# EAGLE board LEDSubMatrixLowDensitySMD - Copy (EAGLE 9.5.2)
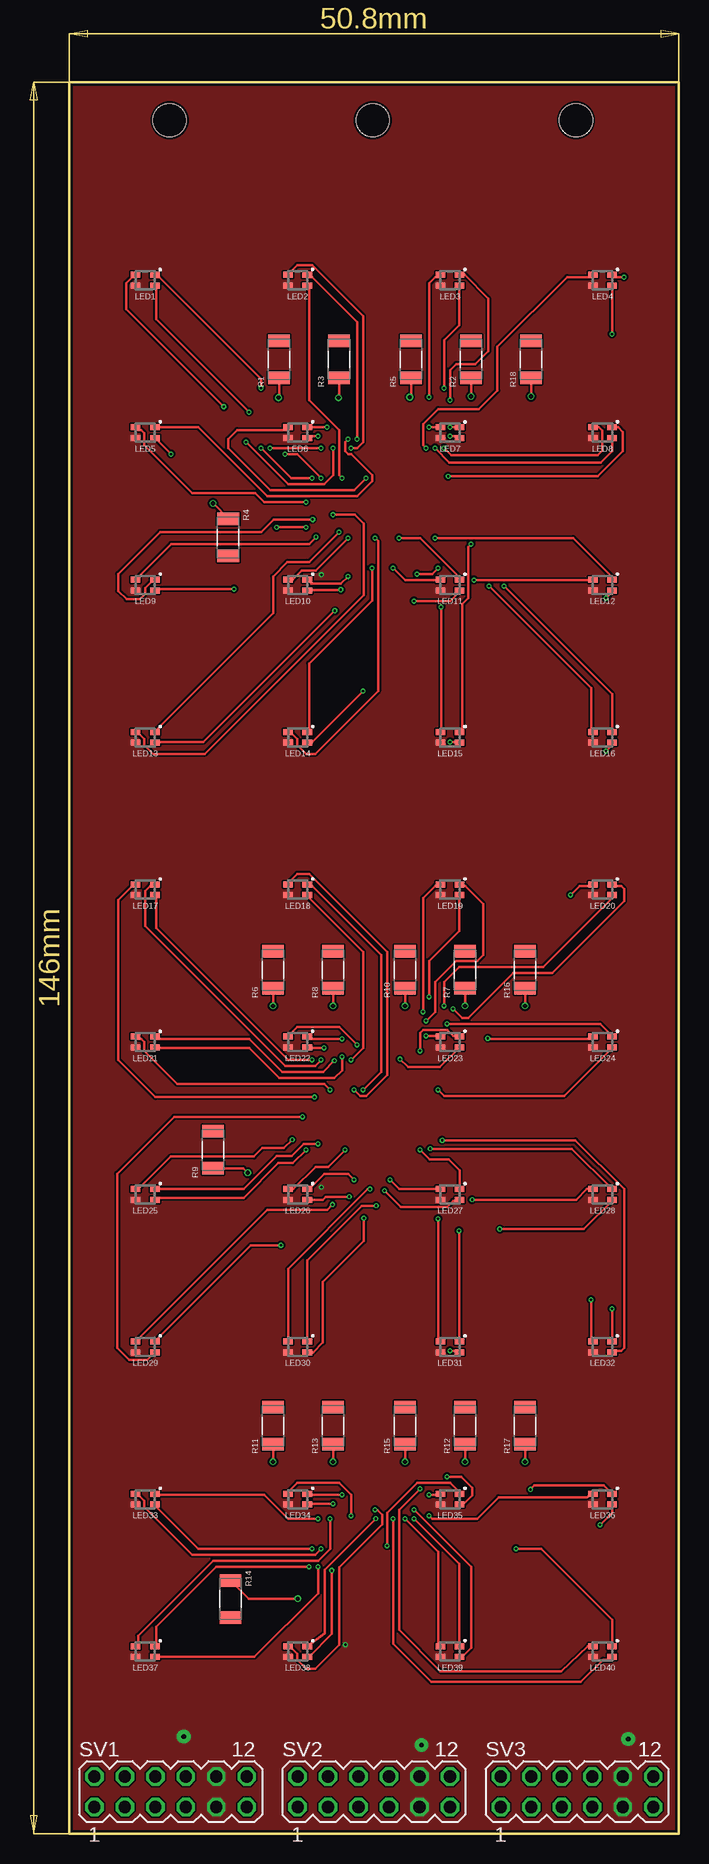
[diagram p0: board, top side]
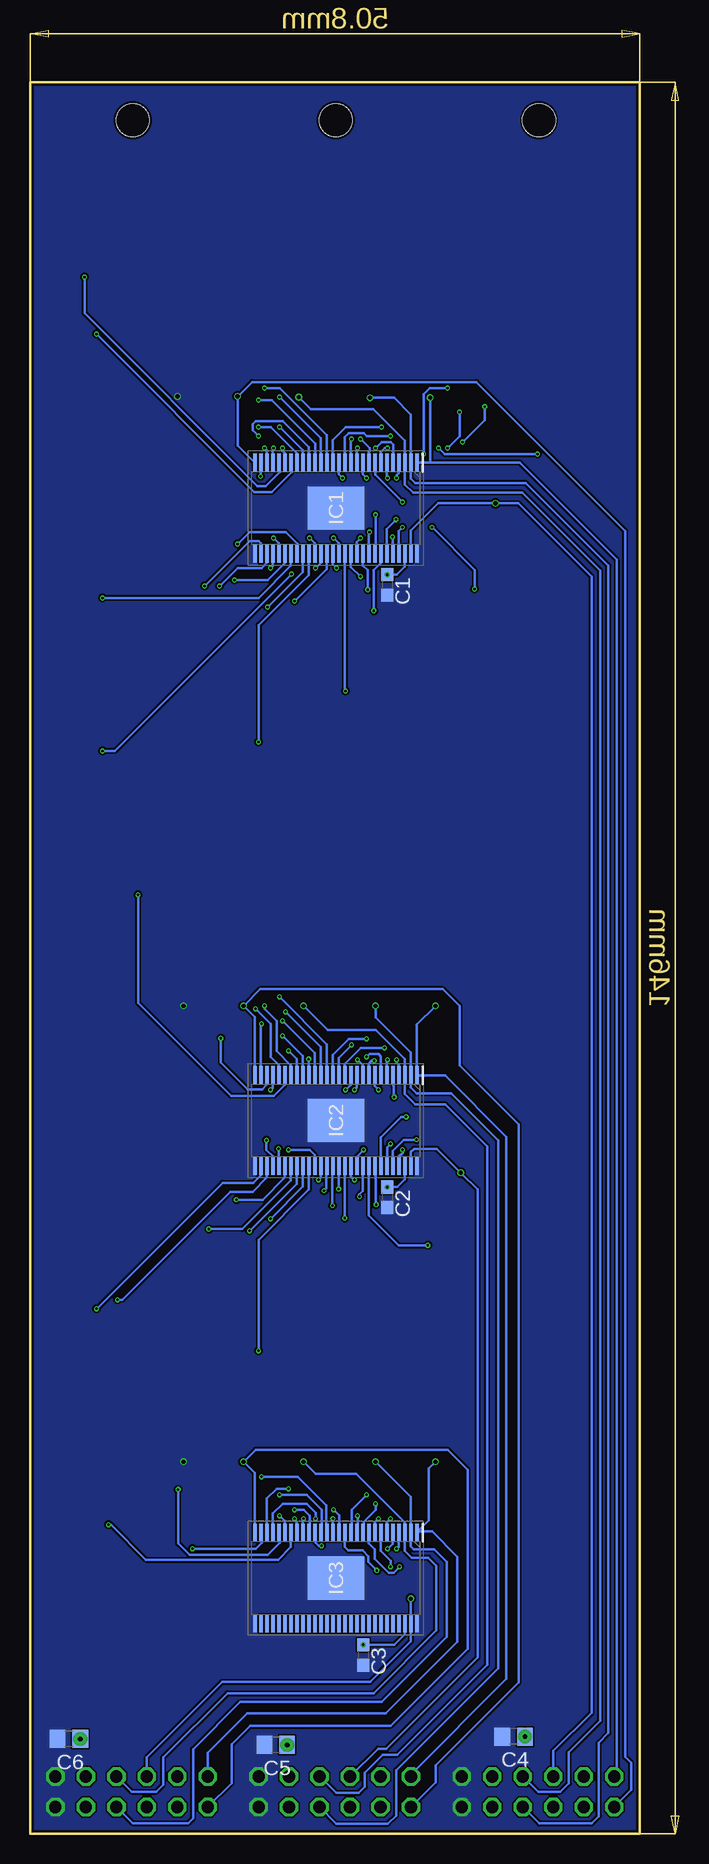
[diagram p1: board, bottom side, seen from below]

Size 50.8 x 146 mm. Coordinates in mm from the lower left corner, seen from the top.
Outline: 0,146 50.8,146 50.8,0 0,0 0,146
Copper layers (1*16): Top 0.035mm / dielectric 0.2mm / Bottom 0.035mm
Design rules "jlcpcb_4layer_1oz *": minimum track width 8mil, minimum drill 0.2mm, track to track 6mil, track to pad 6mil, pad to pad 6mil, via to via 6mil, smd to smd 5mil, copper to edge 8mil, drill to drill 20mil, minimum pad ring 10mil, minimum via ring 0.1mm, stop-mask expansion 4mil, vias tented up to drill 0mil, thermal gap 10mil
Holes 2.75 mm at 8.38,142.82 25.32,142.82 42.25,142.82

## Footprints (pad centres in the part's own frame; a part is rotated, then mirrored left to right if it is on the bottom)
C0603 = smd 1.1 x 1: 1 -0.85,0; 2 0.85,0
C0805 = smd 1.3 x 1.5: 1 -0.95,0; 2 0.95,0
SOP50P810X120-57N = smd 1.475 x 0.3: 1 -3.788,6.75; 2 -3.788,6.25; 3 -3.788,5.75; 4 -3.788,5.25; 5 -3.788,4.75; 6 -3.788,4.25; 7 -3.788,3.75; 8 -3.788,3.25; 9 -3.788,2.75; 10 -3.788,2.25; 11 -3.788,1.75; 12 -3.788,1.25; 13 -3.788,0.75; 14 -3.788,0.25; 15 -3.788,-0.25; 16 -3.788,-0.75; 17 -3.788,-1.25; 18 -3.788,-1.75; 19 -3.788,-2.25; 20 -3.788,-2.75; 21 -3.788,-3.25; 22 -3.788,-3.75; 23 -3.788,-4.25; 24 -3.788,-4.75; 25 -3.788,-5.25; 26 -3.788,-5.75; 27 -3.788,-6.25; 28 -3.788,-6.75; 29 3.788,-6.75; 30 3.788,-6.25; 31 3.788,-5.75; 32 3.788,-5.25; 33 3.788,-4.75; 34 3.788,-4.25; 35 3.788,-3.75; 36 3.788,-3.25; 37 3.788,-2.75; 38 3.788,-2.25; 39 3.788,-1.75; 40 3.788,-1.25; 41 3.788,-0.75; 42 3.788,-0.25; 43 3.788,0.25; 44 3.788,0.75; 45 3.788,1.25; 46 3.788,1.75; 47 3.788,2.25; 48 3.788,2.75; 49 3.788,3.25; 50 3.788,3.75; 51 3.788,4.25; 52 3.788,4.75; 53 3.788,5.25; 54 3.788,5.75; 55 3.788,6.25; 56 3.788,6.75 | smd 3.61 x 4.7: 57 0,0
B38G3RGB = smd 0.8 x 0.5: 1 0.8,0.45; 2 0.8,-0.45; 3 -0.8,-0.45; 4 -0.8,0.45
RESC3216X70N = smd 1.04 x 1.82: 1 -1.54,0; 2 1.54,0
MA06-2 = drill 1.016 octagon: 1 -6.35,-1.27; 2 -6.35,1.27; 3 -3.81,-1.27; 4 -3.81,1.27; 5 -1.27,-1.27; 6 -1.27,1.27; 7 1.27,-1.27; 8 1.27,1.27; 9 3.81,-1.27; 10 3.81,1.27; 11 6.35,-1.27; 12 6.35,1.27

## Placement (x,y rotation side)
C1  .1uF  [C0603]  21.03,104.1 270 bottom
C2  .1uF  [C0603]  21.03,53.05 270 bottom
C3  .1uF  [C0603]  23.03,14.9 270 bottom
C4  10uF  [C0805]  10.5,8.1 180 bottom
C5  10uF  [C0805]  30.32,7.4 180 bottom
C6  10uF  [C0805]  47.56,7.89 180 bottom
IC1  TLC5955DCAR  [SOP50P810X120-57N]  25.32,110.5 270 bottom
IC2  TLC5955DCAR  [SOP50P810X120-57N]  25.32,59.45 270 bottom
IC3  TLC5955DCAR  [SOP50P810X120-57N]  25.32,21.32 270 bottom
LED1  B38G3RGB  [B38G3RGB]  6.35,129.49 0 top
LED2  B38G3RGB  [B38G3RGB]  19.05,129.49 0 top
LED3  B38G3RGB  [B38G3RGB]  31.75,129.49 0 top
LED4  B38G3RGB  [B38G3RGB]  44.45,129.49 0 top
LED5  B38G3RGB  [B38G3RGB]  6.35,116.79 0 top
LED6  B38G3RGB  [B38G3RGB]  19.05,116.79 0 top
LED7  B38G3RGB  [B38G3RGB]  31.75,116.79 0 top
LED8  B38G3RGB  [B38G3RGB]  44.45,116.79 0 top
LED9  B38G3RGB  [B38G3RGB]  6.35,104.09 0 top
LED10  B38G3RGB  [B38G3RGB]  19.05,104.09 0 top
LED11  B38G3RGB  [B38G3RGB]  31.75,104.09 0 top
LED12  B38G3RGB  [B38G3RGB]  44.45,104.09 0 top
LED13  B38G3RGB  [B38G3RGB]  6.35,91.39 0 top
LED14  B38G3RGB  [B38G3RGB]  19.05,91.39 0 top
LED15  B38G3RGB  [B38G3RGB]  31.75,91.39 0 top
LED16  B38G3RGB  [B38G3RGB]  44.45,91.39 0 top
LED17  B38G3RGB  [B38G3RGB]  6.35,78.69 0 top
LED18  B38G3RGB  [B38G3RGB]  19.05,78.69 0 top
LED19  B38G3RGB  [B38G3RGB]  31.75,78.69 0 top
LED20  B38G3RGB  [B38G3RGB]  44.45,78.69 0 top
LED21  B38G3RGB  [B38G3RGB]  6.35,65.99 0 top
LED22  B38G3RGB  [B38G3RGB]  19.05,65.99 0 top
LED23  B38G3RGB  [B38G3RGB]  31.75,65.99 0 top
LED24  B38G3RGB  [B38G3RGB]  44.45,65.99 0 top
LED25  B38G3RGB  [B38G3RGB]  6.35,53.29 0 top
LED26  B38G3RGB  [B38G3RGB]  19.05,53.29 0 top
LED27  B38G3RGB  [B38G3RGB]  31.75,53.29 0 top
LED28  B38G3RGB  [B38G3RGB]  44.45,53.29 0 top
LED29  B38G3RGB  [B38G3RGB]  6.35,40.59 0 top
LED30  B38G3RGB  [B38G3RGB]  19.05,40.59 0 top
LED31  B38G3RGB  [B38G3RGB]  31.75,40.59 0 top
LED32  B38G3RGB  [B38G3RGB]  44.45,40.59 0 top
LED33  B38G3RGB  [B38G3RGB]  6.35,27.89 0 top
LED34  B38G3RGB  [B38G3RGB]  19.05,27.89 0 top
LED35  B38G3RGB  [B38G3RGB]  31.75,27.89 0 top
LED36  B38G3RGB  [B38G3RGB]  44.45,27.89 0 top
LED37  B38G3RGB  [B38G3RGB]  6.35,15.19 0 top
LED38  B38G3RGB  [B38G3RGB]  19.05,15.19 0 top
LED39  B38G3RGB  [B38G3RGB]  31.75,15.19 0 top
LED40  B38G3RGB  [B38G3RGB]  44.45,15.19 0 top
R1  SIN1  [RESC3216X70N]  17.5,122.9 90 top
R2  SOUT1  [RESC3216X70N]  33.5,122.9 90 top
R3  SCLK1  [RESC3216X70N]  22.5,122.9 90 top
R4  GSCLK1  [RESC3216X70N]  13.26,108.04 270 top
R5  LAT1  [RESC3216X70N]  28.5,122.9 90 top
R6  SIN2  [RESC3216X70N]  17,72 90 top
R7  SOUT2  [RESC3216X70N]  33,72 90 top
R8  SCLK2  [RESC3216X70N]  22,72 90 top
R9  GSCLK2  [RESC3216X70N]  12,57 90 top
R10  LAT2  [RESC3216X70N]  28,72 90 top
R11  SIN3  [RESC3216X70N]  17,34 90 top
R12  SOUT3  [RESC3216X70N]  33,34 90 top
R13  SCLK3  [RESC3216X70N]  22,34 90 top
R14  GSCLK3  [RESC3216X70N]  13.45,19.57 270 top
R15  LAT3  [RESC3216X70N]  28,34 90 top
R16  GND  [RESC3216X70N]  38,72 90 top
R17  GND  [RESC3216X70N]  38,34 90 top
R18  GND  [RESC3216X70N]  38.5,122.9 90 top
SV1  [MA06-2]  8.47,3.5 0 top
SV2  [MA06-2]  25.4,3.5 0 top
SV3  [MA06-2]  42.33,3.5 0 top

## Library data of the parts
C1-C6 = rcl; SPICEPREFIX: C
IC1-IC3 = TLC5955DCAR; ARROW_PART_NUMBER: TLC5955DCAR; ARROW_PRICE-STOCK: https://www.arrow.com/en/products/tlc5955dcar/texas-instruments; DESCRIPTION: 48ch, 16bit PWM LED Driver with Dot-Correction, Brightness Control, Open/Short Detection; HEIGHT: 1.2mm; MANUFACTURER_NAME: Texas Instruments; MANUFACTURER_PART_NUMBER: TLC5955DCAR; MOUSER_PART_NUMBER: 595-TLC5955DCAR; MOUSER_PRICE-STOCK: https://www.mouser.co.uk/ProductDetail/Texas-Instruments/TLC5955DCAR?qs=%2Fd%252BFzHvH4c3zo%2FeGYG5n7g%3D%3D
LED1-LED40 = B38G3RGB; ARROW_PART_NUMBER: SML-LX0606IGC-TR; ARROW_PRICE-STOCK: https://www.arrow.com/en/products/sml-lx0606igc-tr/lumex; DESCRIPTION: Standard LEDs - SMD Surface Mount LEDs; HEIGHT: 0.7mm; MANUFACTURER_NAME: Lumex; MANUFACTURER_PART_NUMBER: SML-LX0606IGC-TR; MOUSER_PART_NUMBER: 696-SML-0606IGCTR; MOUSER_PRICE-STOCK: https://www.mouser.co.uk/ProductDetail/Lumex/SML-LX0606IGC-TR?qs=I1ILoAvtKy%252BVd7WFwiUkZQ%3D%3D
R1-R18 = RCWCTE; DESCRIPTION: - PC Test Point - - Plating Surface Mount Mounting Type; DIGI-KEY_PART_NUMBER: 2019-RCWCTECT-ND; MF: KOA Speer; MP: RCWCTE; PACKAGE: None; PURCHASE-URL: https://pricing.snapeda.com/search/part/RCWCTE/?ref=eda
SV1-SV3 = con-lstb; OC_FARNELL: unknown; OC_NEWARK: unknown

## Nets
3V3: C1.1 C2.1 C3.1 C4.1 C5.1 C6.1 IC1.54 IC2.54 IC3.54 LED1.3 LED2.3 LED3.3 LED4.3 LED5.3 LED6.3 LED7.3 LED8.3 LED9.3 LED10.3 LED11.3 LED12.3 LED13.3 LED14.3 LED15.3 LED16.3 LED17.3 LED18.3 LED19.3 LED20.3 LED21.3 LED22.3 LED23.3 LED24.3 LED25.3 LED26.3 LED27.3 LED28.3 LED29.3 LED30.3 LED31.3 LED32.3 LED33.3 LED34.3 LED35.3 LED36.3 LED37.3 LED38.3 LED39.3 LED40.3 SV1.9 SV1.10 SV2.9 SV2.10 SV3.9 SV3.10
GND: C1.2 C2.2 C3.2 C4.2 C5.2 C6.2 IC1.29 IC1.56 IC1.57 IC2.29 IC2.56 IC2.57 IC3.29 IC3.56 IC3.57 R16.1 R17.1 R18.1 SV1.11 SV1.12 SV2.11 SV2.12 SV3.11 SV3.12
GSCLK1: IC1.55 R4.1 SV1.6
GSCLK2: IC2.55 R9.1 SV2.6
GSCLK3: IC3.55 R14.1 SV3.6
LAT1: IC1.3 R5.1 SV1.8
LAT2: IC2.3 R10.1 SV2.8
LAT3: IC3.3 R15.1 SV3.8
N$1: IC3.53
N$2: SV1.3
N$3: SV1.5
N$4: IC3.52
N$5: SV1.4
N$6: IC3.51
N$7: SV2.3
N$8: SV2.5
N$9: IC3.50
N$10: SV2.4
N$11: IC3.49
N$12: SV3.3
N$13: SV3.5
N$14: IC3.48
N$15: SV3.4
N$16: IC3.47
N$17: IC3.46
N$18: IC3.45
N$19: IC3.44
N$20: IC3.43
N$21: IC3.42
N$22: IC3.41
N$23: IC3.40
N$24: IC3.39
N$25: IC3.38
N$26: IC3.37
N$27: IC3.36
N$28: IC3.35
N$29: IC3.34
N$30: IC3.33
N$31: IC3.32
N$32: IC3.31
N$33: IC3.30
N$LEDB1_IC1_PIN4: IC1.4 LED1.2
N$LEDB2_IC1_PIN10: IC1.10 LED2.2
N$LEDB3_IC1_PIN16: IC1.16 LED3.2
N$LEDB4_IC1_PIN22: IC1.22 LED4.2
N$LEDB5_IC1_PIN7: IC1.7 LED5.2
N$LEDB6_IC1_PIN13: IC1.13 LED6.2
N$LEDB7_IC1_PIN19: IC1.19 LED7.2
N$LEDB8_IC1_PIN25: IC1.25 LED8.2
N$LEDB9_IC1_PIN53: IC1.53 LED9.2
N$LEDB10_IC1_PIN47: IC1.47 LED10.2
N$LEDB11_IC1_PIN41: IC1.41 LED11.2
N$LEDB12_IC1_PIN35: IC1.35 LED12.2
N$LEDB13_IC1_PIN50: IC1.50 LED13.2
N$LEDB14_IC1_PIN44: IC1.44 LED14.2
N$LEDB15_IC1_PIN38: IC1.38 LED15.2
N$LEDB16_IC1_PIN32: IC1.32 LED16.2
N$LEDB17_IC2_PIN4: IC2.4 LED17.2
N$LEDB18_IC2_PIN10: IC2.10 LED18.2
N$LEDB19_IC2_PIN16: IC2.16 LED19.2
N$LEDB20_IC2_PIN22: IC2.22 LED20.2
N$LEDB21_IC2_PIN7: IC2.7 LED21.2
N$LEDB22_IC2_PIN13: IC2.13 LED22.2
N$LEDB23_IC2_PIN19: IC2.19 LED23.2
N$LEDB24_IC2_PIN25: IC2.25 LED24.2
N$LEDB25_IC2_PIN53: IC2.53 LED25.2
N$LEDB26_IC2_PIN47: IC2.47 LED26.2
N$LEDB27_IC2_PIN41: IC2.41 LED27.2
N$LEDB28_IC2_PIN35: IC2.35 LED28.2
N$LEDB29_IC2_PIN50: IC2.50 LED29.2
N$LEDB30_IC2_PIN44: IC2.44 LED30.2
N$LEDB31_IC2_PIN38: IC2.38 LED31.2
N$LEDB32_IC2_PIN32: IC2.32 LED32.2
N$LEDB33_IC3_PIN4: IC3.4 LED33.2
N$LEDB34_IC3_PIN10: IC3.10 LED34.2
N$LEDB35_IC3_PIN16: IC3.16 LED35.2
N$LEDB36_IC3_PIN22: IC3.22 LED36.2
N$LEDB37_IC3_PIN7: IC3.7 LED37.2
N$LEDB38_IC3_PIN13: IC3.13 LED38.2
N$LEDB39_IC3_PIN19: IC3.19 LED39.2
N$LEDB40_IC3_PIN25: IC3.25 LED40.2
N$LEDG1_IC1_PIN6: IC1.6 LED1.1
N$LEDG2_IC1_PIN12: IC1.12 LED2.1
N$LEDG3_IC1_PIN18: IC1.18 LED3.1
N$LEDG4_IC1_PIN24: IC1.24 LED4.1
N$LEDG5_IC1_PIN9: IC1.9 LED5.1
N$LEDG6_IC1_PIN15: IC1.15 LED6.1
N$LEDG7_IC1_PIN21: IC1.21 LED7.1
N$LEDG8_IC1_PIN27: IC1.27 LED8.1
N$LEDG9_IC1_PIN51: IC1.51 LED9.1
N$LEDG10_IC1_PIN45: IC1.45 LED10.1
N$LEDG11_IC1_PIN39: IC1.39 LED11.1
N$LEDG12_IC1_PIN33: IC1.33 LED12.1
N$LEDG13_IC1_PIN48: IC1.48 LED13.1
N$LEDG14_IC1_PIN42: IC1.42 LED14.1
N$LEDG15_IC1_PIN36: IC1.36 LED15.1
N$LEDG16_IC1_PIN30: IC1.30 LED16.1
N$LEDG17_IC2_PIN6: IC2.6 LED17.1
N$LEDG18_IC2_PIN12: IC2.12 LED18.1
N$LEDG19_IC2_PIN18: IC2.18 LED19.1
N$LEDG20_IC2_PIN24: IC2.24 LED20.1
N$LEDG21_IC2_PIN9: IC2.9 LED21.1
N$LEDG22_IC2_PIN15: IC2.15 LED22.1
N$LEDG23_IC2_PIN21: IC2.21 LED23.1
N$LEDG24_IC2_PIN27: IC2.27 LED24.1
N$LEDG25_IC2_PIN51: IC2.51 LED25.1
N$LEDG26_IC2_PIN45: IC2.45 LED26.1
N$LEDG27_IC2_PIN39: IC2.39 LED27.1
N$LEDG28_IC2_PIN33: IC2.33 LED28.1
N$LEDG29_IC2_PIN48: IC2.48 LED29.1
N$LEDG30_IC2_PIN42: IC2.42 LED30.1
N$LEDG31_IC2_PIN36: IC2.36 LED31.1
N$LEDG32_IC2_PIN30: IC2.30 LED32.1
N$LEDG33_IC3_PIN6: IC3.6 LED33.1
N$LEDG34_IC3_PIN12: IC3.12 LED34.1
N$LEDG35_IC3_PIN18: IC3.18 LED35.1
N$LEDG36_IC3_PIN24: IC3.24 LED36.1
N$LEDG37_IC3_PIN9: IC3.9 LED37.1
N$LEDG38_IC3_PIN15: IC3.15 LED38.1
N$LEDG39_IC3_PIN21: IC3.21 LED39.1
N$LEDG40_IC3_PIN27: IC3.27 LED40.1
N$LEDR1_IC1_PIN5: IC1.5 LED1.4
N$LEDR2_IC1_PIN11: IC1.11 LED2.4
N$LEDR3_IC1_PIN17: IC1.17 LED3.4
N$LEDR4_IC1_PIN23: IC1.23 LED4.4
N$LEDR5_IC1_PIN8: IC1.8 LED5.4
N$LEDR6_IC1_PIN14: IC1.14 LED6.4
N$LEDR7_IC1_PIN20: IC1.20 LED7.4
N$LEDR8_IC1_PIN26: IC1.26 LED8.4
N$LEDR9_IC1_PIN52: IC1.52 LED9.4
N$LEDR10_IC1_PIN46: IC1.46 LED10.4
N$LEDR11_IC1_PIN40: IC1.40 LED11.4
N$LEDR12_IC1_PIN34: IC1.34 LED12.4
N$LEDR13_IC1_PIN49: IC1.49 LED13.4
N$LEDR14_IC1_PIN43: IC1.43 LED14.4
N$LEDR15_IC1_PIN37: IC1.37 LED15.4
N$LEDR16_IC1_PIN31: IC1.31 LED16.4
N$LEDR17_IC2_PIN5: IC2.5 LED17.4
N$LEDR18_IC2_PIN11: IC2.11 LED18.4
N$LEDR19_IC2_PIN17: IC2.17 LED19.4
N$LEDR20_IC2_PIN23: IC2.23 LED20.4
N$LEDR21_IC2_PIN8: IC2.8 LED21.4
N$LEDR22_IC2_PIN14: IC2.14 LED22.4
N$LEDR23_IC2_PIN20: IC2.20 LED23.4
N$LEDR24_IC2_PIN26: IC2.26 LED24.4
N$LEDR25_IC2_PIN52: IC2.52 LED25.4
N$LEDR26_IC2_PIN46: IC2.46 LED26.4
N$LEDR27_IC2_PIN40: IC2.40 LED27.4
N$LEDR28_IC2_PIN34: IC2.34 LED28.4
N$LEDR29_IC2_PIN49: IC2.49 LED29.4
N$LEDR30_IC2_PIN43: IC2.43 LED30.4
N$LEDR31_IC2_PIN37: IC2.37 LED31.4
N$LEDR32_IC2_PIN31: IC2.31 LED32.4
N$LEDR33_IC3_PIN5: IC3.5 LED33.4
N$LEDR34_IC3_PIN11: IC3.11 LED34.4
N$LEDR35_IC3_PIN17: IC3.17 LED35.4
N$LEDR36_IC3_PIN23: IC3.23 LED36.4
N$LEDR37_IC3_PIN8: IC3.8 LED37.4
N$LEDR38_IC3_PIN14: IC3.14 LED38.4
N$LEDR39_IC3_PIN20: IC3.20 LED39.4
N$LEDR40_IC3_PIN26: IC3.26 LED40.4
SCLK1: IC1.2 R3.1 SV1.7
SCLK2: IC2.2 R8.1 SV2.7
SCLK3: IC3.2 R13.1 SV3.7
SIN1: IC1.1 R1.1 SV1.2
SIN2: IC2.1 R6.1 SV2.2
SIN3: IC3.1 R11.1 SV3.2
SOUT1: IC1.28 R2.1 SV1.1
SOUT2: IC2.28 R7.1 SV2.1
SOUT3: IC3.28 R12.1 SV3.1

## Tracks (layer width: path | path; a pad name or v marks a point on that pad's centre or on a via)
3V3  (via drill 0.2, 0.4 pad 1.15)
  Bottom 0.203: IC1.54 19.57,105.63 20.25,104.95 C1.1 | IC2.54 19.57,54.53 20.2,53.9 C2.1 | IC3.54 19.57,16.63 20.45,15.75 C3.1
  other vias: 21.03,104.95 21.03,53.9 23.03,15.75 9.55,8.1 29.37,7.4 46.61,7.89
  pour Top (no thermals): -20,166 82,166 82,-6 -20,-6
GND  (via drill 0.35)
  Top 0.203: R18.1 v38.5,119.8 | R16.1 v38,69 | R17.1 v38,31
  pour Bottom (no thermals): -20,166 76.2,166 76.2,-3 -20,-3
GSCLK1  (via drill 0.35)
  Top 0.203: v12,110.9 13.28,109.62 R4.1
  Bottom 0.203: SV1.6 7.2,6.9 4,10.1 4,104.8 10.1,110.9 v12,110.9 16.8,110.9 19.07,108.63 IC1.55
GSCLK2  (via drill 0.35)
  Top 0.203: v14.9,55.1 14.54,55.46 R9.1
  Bottom 0.203: SV2.6 21.8,7.1 21.1,7.1 13.5,14.7 13.5,53.7 v14.9,55.1 16.9,57.1 18.79,57.1 19.08,56.81 19.08,55.67 IC2.55
GSCLK3  (via drill 0.35)
  Top 0.203: v19.07,19.59 14.97,19.59 R14.1
  Bottom 0.203: SV3.6 41.06,6.37 34.79,12.65 22.47,12.65 19.07,16.05 IC3.55 19.07,18.64 | v19.07,19.59 19.07,18.64 | 19.07,18.64
LAT1  (via drill 0.35)
  Top 0.203: R5.1 28.5,119.85 v28.4,119.75
  Bottom 0.203: SV1.8 8.47,3.5 6.6,3.5 5.9,4.2 5.9,6.8 3.3,9.4 3.3,105.3 9.78,111.78 18.88,111.78 19.57,112.47 IC1.3 19.57,116.14 22.18,118.75 27.4,118.75 v28.4,119.75
LAT2  (via drill 0.35)
  Top 0.203: R10.1 v28,69
  Bottom 0.203: SV2.8 25.3,3.4 23.4,3.4 22.9,3.9 22.9,5.1 21.4,6.6 20.2,6.6 12.7,14.1 12.7,57.3 16.2,60.8 18.7,60.8 19.57,61.67 IC2.3 19.57,64.56 22,67 26,67 v28,69
LAT3  (via drill 0.35)
  Top 0.203: R15.1 v28,31
  Bottom 0.203: SV3.8 42.33,3.5 40.3,3.5 39.7,4.1 39.7,6.36 34.34,11.72 22.17,11.72 16.94,16.94 16.94,22.34 17.6,23 19,23 19.57,23.56 IC3.3 19.57,25.95 23.61,30 27,30 v28,31
N$LEDB1_IC1_PIN4  (via drill 0.2)
  Top 0.203: v15,118.5 7.25,126.25 7.25,129 LED1.2 | v16,115.5 18.5,113 v20.25,113
  Bottom 0.203: v15,118.5 15,116.5 v16,115.5 | v20.25,113 20.25,113.25 20.07,113.43 IC1.4
N$LEDB2_IC1_PIN10  (via drill 0.2)
  Top 0.203: v22.75,113 22.5,113.25 22.5,117 20,119.5 20,129 LED2.2
  Bottom 0.203: v22.75,113 23.06,113.31 IC1.10
N$LEDB3_IC1_PIN16  (via drill 0.2)
  Top 0.203: v31.25,120.5 31.25,124.5 32.5,125.75 32.5,129 LED3.2
  Bottom 0.203: v31.25,120.5 30,120.5 26.07,116.57 IC1.16
N$LEDB4_IC1_PIN22  (via drill 0.2)
  Top 0.203: v45.25,125 LED4.2
  Bottom 0.203: v45.25,125 32.1,111.85 30.65,111.85 29,113.5 29,114.25 IC1.22
N$LEDB5_IC1_PIN7  (via drill 0.2)
  Top 0.203: v8.5,115 7.25,116.25 LED5.2 | v21,115.5 v16.75,115.5
  Bottom 0.203: v8.5,115 16.25,115 v16.75,115.5 | v21,115.5 21.25,115.5 21.58,115.17 21.58,114.3 IC1.7
N$LEDB6_IC1_PIN13  (via drill 0.2)
  Top 0.203: v20.75,116.5 20,116.5 LED6.2
  Bottom 0.203: v20.75,116.5 22.75,116.5 23,116.75 24.25,116.75 24.57,116.43 IC1.13
N$LEDB7_IC1_PIN19  (via drill 0.2)
  Top 0.203: v31.75,116.5 32.5,116.5 LED7.2
  Bottom 0.203: v31.75,116.5 32.25,117 32.25,117.5 32,117.75 29.75,117.75 27.56,115.56 27.56,114.31 IC1.19
N$LEDB8_IC1_PIN25  (via drill 0.2)
  Top 0.203: v30.5,115.5 31.7,114.3 44.3,114.3 45.25,115.25 LED8.2
  Bottom 0.203: IC1.25 30.59,114.31 30.59,115.41 v30.5,115.5
N$LEDB9_IC1_PIN53  (via drill 0.2)
  Top 0.203: v13.75,103.75 7.25,103.75 LED9.2 | v19.75,108.9 v17.3,108.9
  Bottom 0.203: v17.3,108.9 13.75,105.35 v13.75,103.75 | v19.75,108.9 20.06,108.59 20.06,106.73 20.05,106.72 IC1.53
N$LEDB10_IC1_PIN47  (via drill 0.2)
  Top 0.203: v22.65,103.7 22.6,103.65 LED10.2
  Bottom 0.203: v22.65,103.7 22.66,103.72 22.66,105.31 23.07,105.71 IC1.47
N$LEDB11_IC1_PIN41  (via drill 0.2)
  Top 0.203: v28.75,102.75 31.75,102.75 32.5,103.5 LED11.2
  Bottom 0.203: v28.75,102.75 26.09,105.41 26.09,106.69 IC1.41
N$LEDB12_IC1_PIN35  (via drill 0.2)
  Top 0.203: v44.75,103 45.25,103.5 LED12.2
  Bottom 0.203: v44.75,103 31.75,103 29.05,105.7 29.05,106.38 29.07,106.43 IC1.35
N$LEDB13_IC1_PIN50  (via drill 0.2)
  Top 0.203: v22.15,101.95 11.2,91 7.25,91 LED13.2
  Bottom 0.203: v22.15,101.95 22.15,105.35 21.57,105.93 IC1.50
N$LEDB14_IC1_PIN44  (via drill 0.2)
  Top 0.203: v24.5,95.25 20.25,91 20,91 LED14.2
  Bottom 0.203: v24.5,95.25 24.57,95.32 24.57,106.37 IC1.44
N$LEDB15_IC1_PIN38  (via drill 0.2)
  Top 0.203: v31.75,91 32.5,91 LED15.2
  Bottom 0.203: v31.75,91 31.75,100.75 27.58,104.92 27.58,106.5 27.57,106.5 IC1.38
N$LEDB16_IC1_PIN32  (via drill 0.2)
  Top 0.203: v44.75,90.25 45.25,90.75 LED16.2 | v29,105 30.25,105 v30.75,105.5
  Bottom 0.203: v44.75,90.25 43.75,90.25 v29,105 | v30.75,105.5 30.57,105.68 IC1.32
N$LEDB17_IC2_PIN4  (via drill 0.2)
  Top 0.203: v20.25,64.5 18.25,64.5 7.25,75.5 7.25,78 LED17.2
  Bottom 0.203: v20.25,64.5 20.25,64.25 20.08,64.08 20.08,63.25 IC2.4
N$LEDB18_IC2_PIN10  (via drill 0.2)
  Top 0.203: v23.5,64.5 24.5,65.5 24.5,73.5 20,78 LED18.2
  Bottom 0.203: v23.5,64.5 23.07,64.07 IC2.10
N$LEDB19_IC2_PIN16  (via drill 0.2)
  Top 0.203: v30,69.75 30,72.75 32.5,75.25 32.5,78 LED19.2
  Bottom 0.203: v30,69.75 26.05,65.8 26.05,63.24 IC2.16
N$LEDB20_IC2_PIN22  (via drill 0.2)
  Top 0.203: v31.25,69 31.25,71 32.5,72.25 39.5,72.25 45.25,78 LED20.2
  Bottom 0.203: v31.25,69 31.25,68.75 30.25,67.75 30.25,65.25 29.05,64.05 29.05,63.24 IC2.22
N$LEDB21_IC2_PIN7  (via drill 0.2)
  Top 0.203: v22.75,64.75 22.75,63.63 22.12,63 17.5,63 15,65.5 7.25,65.5 LED21.2
  Bottom 0.203: v22.75,64.75 22.5,65 21.75,65 21.55,64.8 21.55,63.24 IC2.7
N$LEDB22_IC2_PIN13  (via drill 0.2)
  Top 0.203: v21.25,65.5 20,65.5 LED22.2
  Bottom 0.203: v21.25,65.5 23.25,65.5 24.57,64.18 IC2.13
N$LEDB23_IC2_PIN19  (via drill 0.2)
  Top 0.203: v27.58,64.57 28.25,63.9 30.9,63.9 32.5,65.5 LED23.2
  Bottom 0.203: v27.58,64.57 v27.59,64.56 27.59,63.26 IC2.19
N$LEDB24_IC2_PIN25  (via drill 0.2)
  Top 0.203: v30.75,62 31.25,61.5 41.25,61.5 45.25,65.5 LED24.2
  Bottom 0.203: v30.75,62 30.58,62.17 30.58,63.22 IC2.25
N$LEDB25_IC2_PIN53  (via drill 0.2)
  Top 0.203: v19.75,57 18.65,55.9 17.45,55.9 14.55,53 7.25,53 LED25.2
  Bottom 0.203: v19.75,57 19.75,56.75 20.06,56.44 IC2.53
N$LEDB26_IC2_PIN47  (via drill 0.2)
  Top 0.203: v23.35,53.1 21.41,53.1 21.16,52.84 LED26.2
  Bottom 0.203: v23.35,53.1 23.35,53.3 23.06,53.59 IC2.47
N$LEDB27_IC2_PIN41  (via drill 0.2)
  Top 0.203: v26.3,53.6 27.65,52.25 31.5,52.25 32,52.75 32.5,52.75 LED27.2
  Bottom 0.203: IC2.41 26.1,55.63 26.1,53.8 v26.3,53.6
N$LEDB28_IC2_PIN35  (via drill 0.2)
  Top 0.203: v35.9,50.4 42.9,50.4 45.25,52.75 LED28.2
  Bottom 0.203: v35.9,50.4 33.1,50.4 29.06,54.44 IC2.35
N$LEDB29_IC2_PIN50  (via drill 0.2)
  Top 0.203: v19.45,59.75 8.75,59.75 4,55 4,40.5 5,39.5 6.5,39.5 7,40 LED29.2
  Bottom 0.203: v19.45,59.75 19.85,59.75 21.56,58.04 21.56,55.69 21.57,55.68 IC2.50
N$LEDB30_IC2_PIN44  (via drill 0.2)
  Top 0.203: LED30.2 20.35,40.14 21.15,40.94 21.15,45.98 24.57,49.4 v24.57,51.3
  Bottom 0.203: IC2.44 v24.57,51.3
N$LEDB31_IC2_PIN38  (via drill 0.2)
  Top 0.203: v31.75,40.25 32.5,40.25 LED31.2
  Bottom 0.203: v31.75,40.25 31.75,49.5 27.55,53.69 27.55,55.64 IC2.38
N$LEDB32_IC2_PIN32  (via drill 0.2)
  Top 0.203: v31.1,57.8 42.2,57.8 46.25,53.75 46.25,40.5 46,40.25 45.25,40.25 LED32.2
  Bottom 0.203: v31.1,57.8 31.1,57 30.55,56.45 30.55,55.68 IC2.32
N$LEDB33_IC3_PIN4  (via drill 0.2)
  Top 0.203: v20.25,23.75 10.75,23.75 7.25,27.25 LED33.2
  Bottom 0.203: v20.25,23.75 20.07,23.93 IC3.4
N$LEDB34_IC3_PIN10  (via drill 0.2)
  Top 0.203: v22,27.5 20,27.5 LED34.2
  Bottom 0.203: v22,27.5 22,27 23,26 23,25.25 IC3.10
N$LEDB35_IC3_PIN16  (via drill 0.2)
  Top 0.203: LED35.2 32.85,27.44 33.6,28.19 33.6,28.85 32.7,29.75 v31.5,29.75
  Bottom 0.203: v31.5,29.75 28.5,29.75 26.11,27.36 26.11,25.15 IC3.16
N$LEDB36_IC3_PIN22  (via drill 0.2)
  Top 0.203: v44.25,25.75 45.25,26.75 LED36.2
  Bottom 0.203: v44.25,25.75 44.05,25.75 41.15,22.85 30.12,22.85 29.07,23.91 IC3.22
N$LEDB37_IC3_PIN7  (via drill 0.2)
  Top 0.203: v20.75,22.25 20.75,20.05 15.45,14.75 7.25,14.75 LED37.2
  Bottom 0.203: v20.75,22.25 20.75,22.75 21.57,23.56 IC3.7
N$LEDB38_IC3_PIN13  (via drill 0.2)
  Top 0.203: v21.9,21.95 21.9,16.65 20,14.75 LED38.2
  Bottom 0.203: v21.9,21.95 22.6,22.65 22.6,23.14 23.07,23.61 24.27,23.61 24.57,23.91 IC3.13
N$LEDB39_IC3_PIN19  (via drill 0.2)
  Top 0.203: v28.75,27 33.5,22.25 33.5,15.5 32.75,14.75 LED39.2
  Bottom 0.203: v28.75,27 28,27 27.5,26.5 27.5,25.25 IC3.19
N$LEDB40_IC3_PIN25  (via drill 0.2)
  Top 0.203: v27,26.25 27,15.85 30.2,12.65 42.65,12.65 44.5,14.5 45.25,14.5 LED40.2
  Bottom 0.203: v27,26.25 27,26.75 27.75,27.5 29.75,27.5 30.55,26.7 30.55,25.14 IC3.25
N$LEDG1_IC1_PIN6  (via drill 0.2)
  Top 0.203: v16,120.5 16,121.25 7.5,129.75 7.25,129.75 LED1.1 | v18,115 19,115 v21,113
  Bottom 0.203: v16,120.5 17.5,120.5 18,120 v18,115 | IC1.6 21.07,113.07 v21,113
N$LEDG2_IC1_PIN12  (via drill 0.2)
  Top 0.203: v24,116.25 24,126 20.25,129.75 20,129.75 LED2.1
  Bottom 0.203: IC1.12 24.07,116.18 v24,116.25
N$LEDG3_IC1_PIN18  (via drill 0.2)
  Top 0.203: LED3.1 32.96,129.94 34.95,127.95 34.95,123.6 33.85,122.5 32.25,122.5 31.75,122 v31.75,119.5
  Bottom 0.203: v31.75,119.5 30.65,119.5 27.04,115.89 27.04,114.37 IC1.18
N$LEDG4_IC1_PIN24  (via drill 0.2)
  Top 0.203: v46.25,129.75 45.25,129.75 LED4.1
  Bottom 0.203: v46.25,129.75 46.25,126.75 31.85,112.35 31.15,112.35 30,113.5 30,114.25 IC1.24
N$LEDG5_IC1_PIN9  (via drill 0.2)
  Top 0.203: v23.25,116.25 23,116 23,115.25 23.25,115 23.5,115 25.25,113.25 25.25,112.75 24,111.5 16.5,111.5 10.75,117.25 7.25,117.25 LED5.1
  Bottom 0.203: v23.25,116.25 22.5,115.5 22.5,115.34 22.57,115.12 IC1.9
N$LEDG6_IC1_PIN15  (via drill 0.2)
  Top 0.203: v21.5,117.25 20,117.25 LED6.1
  Bottom 0.203: v21.5,117.25 24.5,117.25 25.58,116.17 25.58,114.3 IC1.15
N$LEDG7_IC1_PIN21  (via drill 0.2)
  Top 0.203: v31.75,117.25 32.5,117.25 LED7.1
  Bottom 0.203: v31.75,117.25 30.75,117.25 28.57,115.07 IC1.21
N$LEDG8_IC1_PIN27  (via drill 0.2)
  Top 0.203: LED8.1 45.75,117.24 46.15,116.84 46.15,115.24 44.06,113.15 v31.6,113.15
  Bottom 0.203: IC1.27 31.58,114.27 31.58,113.17 v31.6,113.15
N$LEDG9_IC1_PIN51  (via drill 0.2)
  Top 0.203: v20.3,109.55 17.05,109.55 16,108.5 7.6,108.5 4.1,105 4.1,103.6 4.8,102.9 5.9,102.9 6.35,103.35 6.35,103.85 7,104.5 LED9.1
  Bottom 0.203: v20.3,109.55 21.09,108.76 21.09,106.74 IC1.51
N$LEDG10_IC1_PIN45  (via drill 0.2)
  Top 0.203: v23.25,104.8 22.65,104.2 20.19,104.2 LED10.1
  Bottom 0.203: v23.25,104.8 24.05,105.6 24.05,106.66 IC1.45
N$LEDG11_IC1_PIN39  (via drill 0.2)
  Top 0.203: v27.5,108 29.25,108 32.5,104.75 LED11.1
  Bottom 0.203: v27.5,108 27.06,107.56 IC1.39
N$LEDG12_IC1_PIN33  (via drill 0.2)
  Top 0.203: v30.5,108 42,108 45.25,104.75 LED12.1
  Bottom 0.203: v30.5,108 30.06,107.56 30.07,107.56 IC1.33
N$LEDG13_IC1_PIN48  (via drill 0.2)
  Top 0.203: v22.5,108.5 20,106 18.2,106 17,104.8 17,101.75 7.25,92 LED13.1
  Bottom 0.203: v22.5,108.5 22.55,108.45 22.55,106.72 IC1.48
N$LEDG14_IC1_PIN42  (via drill 0.2)
  Top 0.203: v25.25,105.5 25.25,102.8 20,97.55 20,92 LED14.1
  Bottom 0.203: v25.25,105.5 25.56,105.81 25.56,106.69 IC1.42
N$LEDG15_IC1_PIN36  (via drill 0.2)
  Top 0.203: v33.5,107.5 33.25,107.25 33.25,103 32.75,102.5 32.75,92 LED15.1
  Bottom 0.203: v33.5,107.5 32.5,108.5 29.5,108.5 28.54,107.54 28.54,106.72 28.55,106.71 IC1.36
N$LEDG16_IC1_PIN30  (via drill 0.2)
  Top 0.203: LED16.1 45.25,95 v36.25,104
  Bottom 0.203: v36.25,104 32.5,107.75 31.75,107.75 31.56,107.56 IC1.30
N$LEDG17_IC2_PIN6  (via drill 0.2)
  Top 0.203: v21,64.5 20.5,64 18,64 6.35,75.65 6.35,78.6 6.75,79 7,79 LED17.1
  Bottom 0.203: IC2.6 21.07,64.43 v21,64.5
N$LEDG18_IC2_PIN12  (via drill 0.2)
  Top 0.203: v24.5,62 26,63.5 26,73.25 20.25,79 20,79 LED18.1
  Bottom 0.203: v24.5,62 24.08,62.42 24.08,63.22 IC2.12
N$LEDG19_IC2_PIN18  (via drill 0.2)
  Top 0.203: v29.75,67.75 30.5,68.5 30.5,71 32.25,72.75 34,72.75 34.5,73.25 34.5,77.5 33,79 32.75,79 LED19.1
  Bottom 0.203: v29.75,67.75 27.06,65.06 IC2.18
N$LEDG20_IC2_PIN24  (via drill 0.2)
  Top 0.203: v32,68.75 32.75,68 33.25,68 37,71.75 40.25,71.75 46.25,77.75 46.25,78.75 46,79 45.25,79 LED20.1
  Bottom 0.203: v32,68.75 30.75,67.5 30.75,64.75 30.06,64.06 IC2.24
N$LEDG21_IC2_PIN9  (via drill 0.2)
  Top 0.203: v22.11,64.44 21.17,63.5 17.75,63.5 15,66.25 7.25,66.25 LED21.1
  Bottom 0.203: v22.11,64.44 22.31,64.44 22.57,64.18 22.57,63.29 IC2.9
N$LEDG22_IC2_PIN15  (via drill 0.2)
  Top 0.203: v22.75,66.25 20,66.25 LED22.1
  Bottom 0.203: v22.75,66.25 24.25,66.25 25.58,64.92 25.58,63.25 IC2.15
N$LEDG23_IC2_PIN21  (via drill 0.2)
  Top 0.203: v29.25,65.25 29.25,66.75 29.5,67 31.5,67 32,66.5 32.5,66.5 LED23.1
  Bottom 0.203: v29.25,65.25 28.58,64.58 28.58,63.25 IC2.21
N$LEDG24_IC2_PIN27  (via drill 0.2)
  Top 0.203: v31.5,67.5 44.25,67.5 45.25,66.5 LED24.1
  Bottom 0.203: v31.5,67.5 31.58,67.42 31.58,63.25 IC2.27
N$LEDG25_IC2_PIN51  (via drill 0.2)
  Top 0.203: v20.75,57.5 19.55,57.5 18.55,56.5 17.3,56.5 14.55,53.75 7.25,53.75 LED25.1
  Bottom 0.203: v20.75,57.5 21.05,57.2 21.05,55.69 IC2.51
N$LEDG26_IC2_PIN45  (via drill 0.2)
  Top 0.203: v23.75,54.5 23.25,55 21.25,55 20,53.75 LED26.1
  Bottom 0.203: v23.75,54.5 24.06,54.81 24.06,55.64 IC2.45
N$LEDG27_IC2_PIN39  (via drill 0.2)
  Top 0.203: LED27.1 32.55,55.3 31.65,56.2 30.05,56.2 v29.25,57
  Bottom 0.203: v29.25,57 27.5,57 27.08,56.58 27.08,55.68 IC2.39
N$LEDG28_IC2_PIN33  (via drill 0.2)
  Top 0.203: v30.1,57.1 41.9,57.1 LED28.1
  Bottom 0.203: v30.1,57.1 30.05,57.06 30.05,55.68 IC2.33
N$LEDG29_IC2_PIN48  (via drill 0.2)
  Top 0.203: v17.65,49.04 15.15,49.04 LED29.1
  Bottom 0.203: IC2.48 22.57,51.56 20.05,49.04 v17.65,49.04
N$LEDG30_IC2_PIN42  (via drill 0.2)
  Top 0.203: LED30.1 19.85,47.8 24.4,52.35 v25.6,52.35
  Bottom 0.203: IC2.42 25.6,55.63 v25.6,52.35
N$LEDG31_IC2_PIN36  (via drill 0.2)
  Top 0.203: v32.5,50.25 32.5,41.25 LED31.1
  Bottom 0.203: v32.5,50.25 28.58,54.17 28.58,55.65 IC2.36
N$LEDG32_IC2_PIN30  (via drill 0.2)
  Top 0.203: v45.25,43.75 LED32.1
  Bottom 0.203: v45.25,43.75 34.75,54.25 32.18,54.25 31.57,54.86 IC2.30
N$LEDG33_IC3_PIN6  (via drill 0.2)
  Top 0.203: v20.75,26.25 18.25,26.25 16.25,28.25 7.25,28.25 LED33.1
  Bottom 0.203: v20.75,26.25 21.07,25.94 IC3.6 | IC3.6
N$LEDG34_IC3_PIN12  (via drill 0.2)
  Top 0.203: v22.75,28.25 20,28.25 LED34.1
  Bottom 0.203: v22.75,28.25 24,27 24,25.25 IC3.12
N$LEDG35_IC3_PIN18  (via drill 0.2)
  Top 0.203: v26.5,24 26.5,26.75 29,29.25 31.75,29.25 32.5,28.5 LED35.1
  Bottom 0.203: v26.5,24 26.75,24 27,24.25 27,25 IC3.18
N$LEDG36_IC3_PIN24  (via drill 0.2)
  Top 0.203: LED36.1 44.55,29.04 38.79,29.04 v38.45,28.7
  Bottom 0.203: v38.45,28.7 38.45,24.2 37.5,23.25 31,23.25 30,24.25 30,25 IC3.24
N$LEDG37_IC3_PIN9  (via drill 0.2)
  Top 0.203: v20,22.25 12.25,22.25 7.25,17.25 7.25,15.75 LED37.1
  Bottom 0.203: v20,22.25 20.5,21.75 20.9,21.75 22.07,22.92 22.07,23.7 22.57,24.2 IC3.9
N$LEDG38_IC3_PIN15  (via drill 0.2)
  Top 0.203: v25.56,26.26 21.3,22 21.3,16.7 LED38.1
  Bottom 0.203: v25.56,26.26 25.56,25.12 IC3.15
N$LEDG39_IC3_PIN21  (via drill 0.2)
  Top 0.203: v28.75,26.25 32.5,22.5 32.5,15.75 LED39.1
  Bottom 0.203: v28.75,26.25 28.75,26.16 28.57,25.97 IC3.21
N$LEDG40_IC3_PIN27  (via drill 0.2)
  Top 0.203: v37.25,23.75 39.35,23.75 45.25,17.85 LED40.1
  Bottom 0.203: v37.25,23.75 32,23.75 31.5,24.25 31.5,25 IC3.27
N$LEDR1_IC1_PIN5  (via drill 0.2)
  Top 0.203: v12.9,118.95 4.75,127.1 4.75,129.25 5.25,129.75 5.5,129.75 LED1.4 | v14.75,116 18.25,112.5 21.25,112.5 22,113.25 v22,115.5
  Bottom 0.203: v12.9,118.95 12.9,117.85 v14.75,116 | v22,115.5 21.5,116 20.75,116 20.54,115.79 20.54,114.37 IC1.5
N$LEDR2_IC1_PIN11  (via drill 0.2)
  Top 0.203: v23.5,115.5 24,115.5 24.5,116 24.5,126.5 20.25,130.75 19,130.75 18.25,130 LED2.4
  Bottom 0.203: IC1.11 23.57,115.43 v23.5,115.5
N$LEDR3_IC1_PIN17  (via drill 0.2)
  Top 0.203: v30,119.75 30,129.25 30.5,129.75 30.75,129.75 LED3.4
  Bottom 0.203: v30,119.75 26.59,116.34 26.59,114.31 IC1.17
N$LEDR4_IC1_PIN23  (via drill 0.2)
  Top 0.203: v29.75,115.5 29.5,115.75 29.5,117.5 30.75,118.75 34.15,118.75 35.7,120.3 35.7,123.95 41.5,129.75 43.5,129.75 LED4.4
  Bottom 0.203: v29.75,115.5 29.75,115.25 29.58,115.08 29.58,114.3 IC1.23
N$LEDR5_IC1_PIN8  (via drill 0.2)
  Top 0.203: v19.75,111 16.25,111 15.5,111.75 10.25,111.75 6.25,115.75 6.25,116.75 6,117 5.75,117 LED5.4
  Bottom 0.203: v19.75,111 22.04,113.29 22.04,114.27 IC1.8
N$LEDR6_IC1_PIN14  (via drill 0.2)
  Top 0.203: v24.75,113 23.75,112 16.75,112 13.25,115.5 13.25,116.25 14,117 18.25,117 LED6.4
  Bottom 0.203: v24.75,113 25.07,113.31 IC1.14
N$LEDR7_IC1_PIN20  (via drill 0.2)
  Top 0.203: v30,117.25 30.75,117.25 LED7.4
  Bottom 0.203: v30,117.25 28.07,115.32 IC1.20
N$LEDR8_IC1_PIN26  (via drill 0.2)
  Top 0.203: LED8.4 44.15,117.24 44.45,116.94 44.45,115.3 44.05,114.9 31.85,114.9 v31.25,115.5
  Bottom 0.203: v31.25,115.5 31.06,115.31 31.06,114.31 IC1.26
N$LEDR9_IC1_PIN52  (via drill 0.2)
  Top 0.203: v20.59,108.09 20,107.5 8.5,107.5 5.75,104.75 LED9.4
  Bottom 0.203: IC1.52 20.57,108.07 v20.59,108.09
N$LEDR10_IC1_PIN46  (via drill 0.2)
  Top 0.203: LED10.4 18.64,104.54 19.4,105.3 20.55,105.3 v23.25,108
  Bottom 0.203: v23.25,108 23.57,107.68 IC1.46
N$LEDR11_IC1_PIN40  (via drill 0.2)
  Top 0.203: v27,105.5 28,104.5 30.75,104.5 LED11.4
  Bottom 0.203: v27,105.5 26.53,105.97 26.53,106.6 IC1.40
N$LEDR12_IC1_PIN34  (via drill 0.2)
  Top 0.203: v33.75,104.5 43.5,104.5 LED12.4
  Bottom 0.203: v33.75,104.5 31,104.5 29.58,105.92 29.58,106.7 IC1.34
N$LEDR13_IC1_PIN49  (via drill 0.2)
  Top 0.203: v22,109.95 23.8,109.95 24.55,109.2 24.55,103.25 11.3,90 7,90 6.25,90.75 6.25,91.25 5.75,91.75 LED13.4
  Bottom 0.203: v22,109.95 22,106.75 IC1.49
N$LEDR14_IC1_PIN43  (via drill 0.2)
  Top 0.203: v25.5,108 25.75,107.75 25.75,95.25 20.5,90 19.75,90 19,90.75 19,91.25 18.5,91.75 18.25,91.75 LED14.4
  Bottom 0.203: v25.5,108 25.06,107.56 IC1.43
N$LEDR15_IC1_PIN37  (via drill 0.2)
  Top 0.203: v31,102.25 31,92 LED15.4
  Bottom 0.203: v31,102.25 28.08,105.17 28.08,106.7 IC1.37
N$LEDR16_IC1_PIN31  (via drill 0.2)
  Top 0.203: v35,104 43.5,95.5 43.5,92 LED16.4
  Bottom 0.203: v35,104 33.5,105.5 31.5,105.5 31.05,105.95 31.05,106.66 IC1.31
N$LEDR17_IC2_PIN5  (via drill 0.2)
  Top 0.203: v20.45,61.4 7.2,61.4 4.1,64.5 4.1,77.85 5.25,79 5.5,79 LED17.4
  Bottom 0.203: v20.45,61.4 20.5,61.45 20.5,62.27 20.57,62.51 IC2.5
N$LEDR18_IC2_PIN11  (via drill 0.2)
  Top 0.203: v23.75,62 24.25,61.5 24.76,61.5 26.5,63.24 26.5,73.5 20,80 19,80 18.25,79.25 LED18.4
  Bottom 0.203: v23.75,62 23.55,62.2 23.55,63.18 IC2.11
N$LEDR19_IC2_PIN17  (via drill 0.2)
  Top 0.203: v29.5,68.5 29.5,78 30.5,79 30.75,79 LED19.4
  Bottom 0.203: v29.5,68.5 26.56,65.56 26.56,62.98 26.57,63.01 IC2.17
N$LEDR20_IC2_PIN23  (via drill 0.2)
  Top 0.203: v41.8,78.25 42.55,79 43.5,79 LED20.4
  Bottom 0.203: v41.8,78.25 41.8,69.25 34.05,61.5 30.5,61.5 29.58,62.42 29.58,63.22 IC2.23
N$LEDR21_IC2_PIN8  (via drill 0.2)
  Top 0.203: v21.75,62 21.25,62.5 9,62.5 6.25,65.25 6.25,66 6,66.25 5.75,66.25 LED21.4
  Bottom 0.203: v21.75,62 22.07,62.32 IC2.8
N$LEDR22_IC2_PIN14  (via drill 0.2)
  Top 0.203: v24,65.75 22.5,67.25 19,67.25 18.25,66.5 LED22.4
  Bottom 0.203: v24,65.75 25.08,64.67 25.08,63.25 IC2.14
N$LEDR23_IC2_PIN20  (via drill 0.2)
  Top 0.203: v29.75,66.5 30.75,66.5 LED23.4
  Bottom 0.203: v29.75,66.5 28.07,64.82 IC2.20
N$LEDR24_IC2_PIN26  (via drill 0.2)
  Top 0.203: v34.9,66.3 34.95,66.25 43.5,66.25 LED24.4
  Bottom 0.203: IC2.26 31.05,63.23 31.05,62.45 31.46,62.04 32.64,62.04 34.9,64.3 v34.9,66.3
N$LEDR25_IC2_PIN52  (via drill 0.2)
  Top 0.203: v18.6,57.85 17.9,57.15 16.1,57.15 15.4,56.45 8.46,56.45 5.75,53.74 LED25.4
  Bottom 0.203: v18.6,57.85 19.65,57.85 20.57,56.93 IC2.52
N$LEDR26_IC2_PIN46  (via drill 0.2)
  Top 0.203: LED26.4 18.69,53.74 20.55,55.6 21.6,55.6 v23,57
  Bottom 0.203: v23,57 23.59,56.41 23.59,55.69 IC2.46
N$LEDR27_IC2_PIN40  (via drill 0.2)
  Top 0.203: v26.75,54.5 27.5,53.75 30.75,53.75 LED27.4
  Bottom 0.203: v26.75,54.5 26.55,54.7 26.55,55.63 IC2.40
N$LEDR28_IC2_PIN34  (via drill 0.2)
  Top 0.203: LED28.4 43.15,53.74 42.26,52.85 v33.6,52.85
  Bottom 0.203: v33.6,52.85 31.4,52.85 29.56,54.69 IC2.34
N$LEDR29_IC2_PIN49  (via drill 0.2)
  Top 0.203: v21.95,52.45 21.5,52 16.5,52 5.75,41.25 LED29.4
  Bottom 0.203: v21.95,52.45 22,52.5 22,54.79 22.07,54.95 IC2.49
N$LEDR30_IC2_PIN43  (via drill 0.2)
  Top 0.203: LED30.4 18.25,47.07 24.92,53.74 v25.08,53.74
  Bottom 0.203: IC2.43 v25.08,53.74
N$LEDR31_IC2_PIN37  (via drill 0.2)
  Top 0.203: v30.75,51.25 30.75,41.25 LED31.4
  Bottom 0.203: v30.75,51.25 28.06,53.94 IC2.37
N$LEDR32_IC2_PIN31  (via drill 0.2)
  Top 0.203: v43.5,44.5 43.5,41.25 LED32.4
  Bottom 0.203: v43.5,44.5 43.1,44.5 34.1,53.5 32.25,53.5 31.07,54.69 IC2.31
N$LEDR33_IC3_PIN5  (via drill 0.2)
  Top 0.203: v21,23.75 20.5,23.25 10.25,23.25 6.25,27.25 6.25,27.75 5.75,28.25 LED33.4
  Bottom 0.203: v21,23.75 20.58,24.17 20.58,25.09 IC3.5
N$LEDR34_IC3_PIN11  (via drill 0.2)
  Top 0.203: v23.5,26.5 23.5,28.25 22.5,29.25 19,29.25 18.25,28.5 LED34.4
  Bottom 0.203: v23.5,26.5 23.5,25.25 IC3.11
N$LEDR35_IC3_PIN17  (via drill 0.2)
  Top 0.203: v30,28.25 30.75,28.25 LED35.4
  Bottom 0.203: v30,28.25 27.75,28.25 26.5,27 26.5,25.25 IC3.17
N$LEDR36_IC3_PIN23  (via drill 0.2)
  Top 0.203: v30,26.5 30.25,26.25 34,26.25 35.8,28.05 43.17,28.05 LED36.4
  Bottom 0.203: v30,26.5 29.57,26.07 29.57,25.11 IC3.23
N$LEDR37_IC3_PIN8  (via drill 0.2)
  Top 0.203: v21.75,26.25 21.75,23.75 20.75,22.75 12,22.75 5.75,16.5 5.75,15.75 LED37.4
  Bottom 0.203: v21.75,26.25 22.07,25.94 IC3.8 | IC3.8
N$LEDR38_IC3_PIN14  (via drill 0.2)
  Top 0.203: v25.5,27 25.69,27 26.1,26.59 26.1,25.8 22.5,22.2 22.5,15.75 20.5,13.75 19.75,13.75 19,14.5 19,15 18.5,15.5 18.25,15.5 LED38.4
  Bottom 0.203: v25.5,27 25.02,26.52 25.02,25.21 IC3.14
N$LEDR39_IC3_PIN20  (via drill 0.2)
  Top 0.203: v28,26.25 30.75,23.5 30.75,15.75 LED39.4
  Bottom 0.203: v28,26.25 28.08,26.17 28.08,25.12 IC3.20
N$LEDR40_IC3_PIN26  (via drill 0.2)
  Top 0.203: v29.25,28.75 27.5,27 27.5,17 30.95,13.55 41,13.55 43.24,15.64 LED40.4
  Bottom 0.203: v29.25,28.75 30.25,28.75 31.07,27.94 IC3.26
SCLK1  (via drill 0.35)
  Top 0.203: R3.1 22.5,119.73 v22.46,119.69
  Bottom 0.203: SV1.7 8.36,0.86 4,0.86 3.4,1.46 3.4,7.6 2.6,8.4 2.6,105.7 9.5,112.6 18.7,112.6 19.07,112.97 IC1.2 19.07,118.3 20.46,119.69 v22.46,119.69
SCLK2  (via drill 0.35)
  Top 0.203: R8.1 v22,69
  Bottom 0.203: SV2.7 25.27,0.83 20.97,0.83 20.3,1.5 20.3,5.3 11.8,13.8 11.8,57.8 15.7,61.7 18.57,61.7 19.07,62.19 IC2.2 19.09,63.26 19.09,65.11 22,68.02 v22,69
SCLK3  (via drill 0.35)
  Top 0.203: R13.1 v22,31
  Bottom 0.203: SV3.7 42.25,0.88 37.62,0.88 37.2,1.3 37.2,7.04 33.26,10.98 21.48,10.98 16.06,16.4 16.06,22.65 17.11,23.7 18.82,23.7 19.07,23.94 IC3.2 19.07,28.06 v22,31
SIN1  (via drill 0.35)
  Top 0.203: R1.1 17.5,119.75 v17.45,119.71
  Bottom 0.203: SV1.2 1.92,4.97 1.92,106.22 10,114.3 17.45,114.3 | 17.45,114.3 18.55,114.3 IC1.1 | v17.45,119.71 17.45,114.3
SIN2  (via drill 0.35)
  Top 0.203: R6.1 v17,69
  Bottom 0.203: SV2.2 19.05,4.97 11.1,12.92 11.1,58.1 16.2,63.2 18.53,63.2 IC2.1 18.57,67.44 v17,69
SIN3  (via drill 0.35)
  Top 0.203: R11.1 v17,31
  Bottom 0.203: v17,31 17.57,30.44 17.57,26.11 IC3.1 18.47,25.2 17.3,25.2 15.18,23.08 15.18,16.01 21.16,10.04 32.7,10.04 35.98,6.76 SV3.2
SOUT1  (via drill 0.35)
  Top 0.203: v33.5,119.8 R2.1
  Bottom 0.203: SV1.1 0.7,3.65 0.7,5.9 1.2,6.4 1.2,108.6 13.6,121 32.3,121 v33.5,119.8 33.5,115.72 IC1.28
SOUT2  (via drill 0.35)
  Top 0.203: R7.1 v33,69
  Bottom 0.203: IC2.28 32.06,68.06 v33,69 31.61,70.39 16.39,70.39 15,69 15,64.05 10.07,59.12 10.07,12.64 17,5.71 17,4.28 SV2.1
SOUT3  (via drill 0.35)
  Top 0.203: R12.1 v33,31
  Bottom 0.203: IC3.28 32.06,30.06 v33,31 32,32 16,32 14.33,30.33 14.33,15.4 20.72,9 32.44,9 34,7.44 34,4.21 SV3.1